# Altium PCB PCB1.PcbDoc
Units mm, origin at the board's own origin, x right, y up, seen from the top; angles counter-clockwise.
Board outline 41.91 x 29.34 mm, 2 copper layers (Top Layer, Bottom Layer); 12 components, 6 nets, 32 pads, 6 vias.
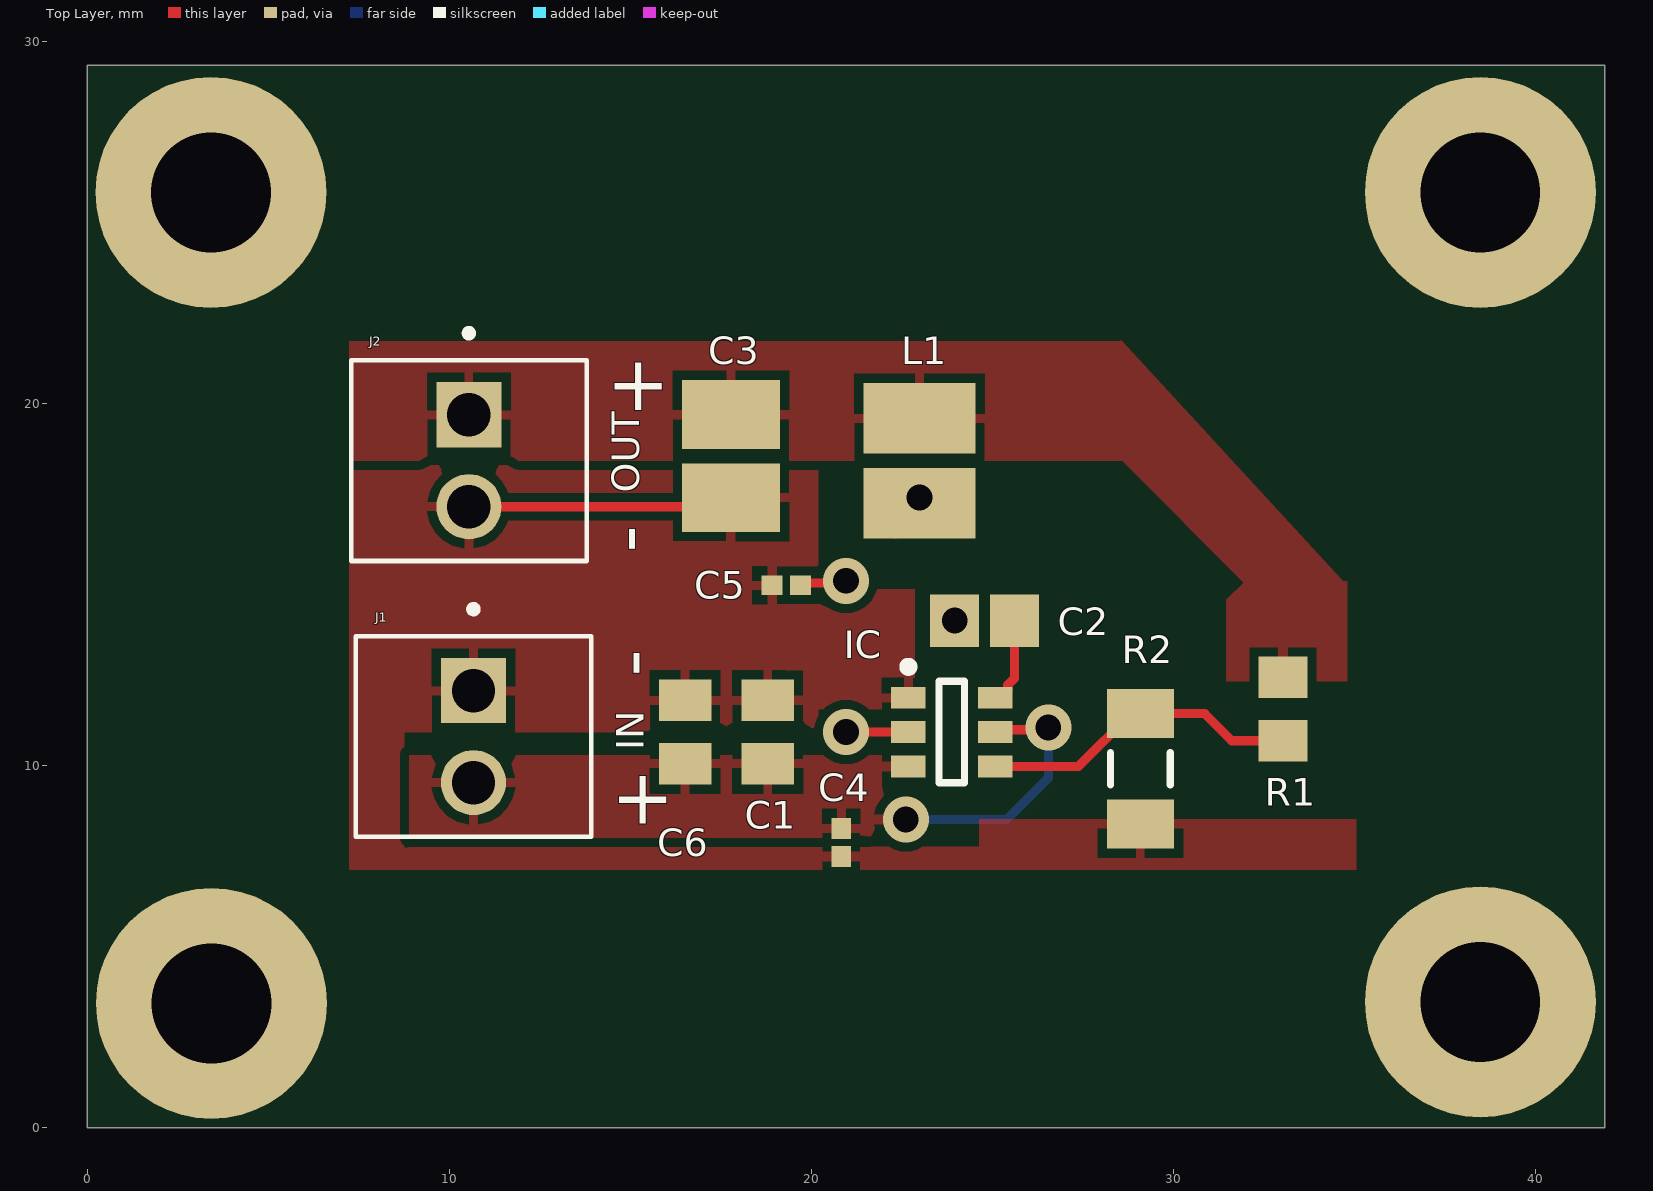
[diagram p0: Top Layer view]
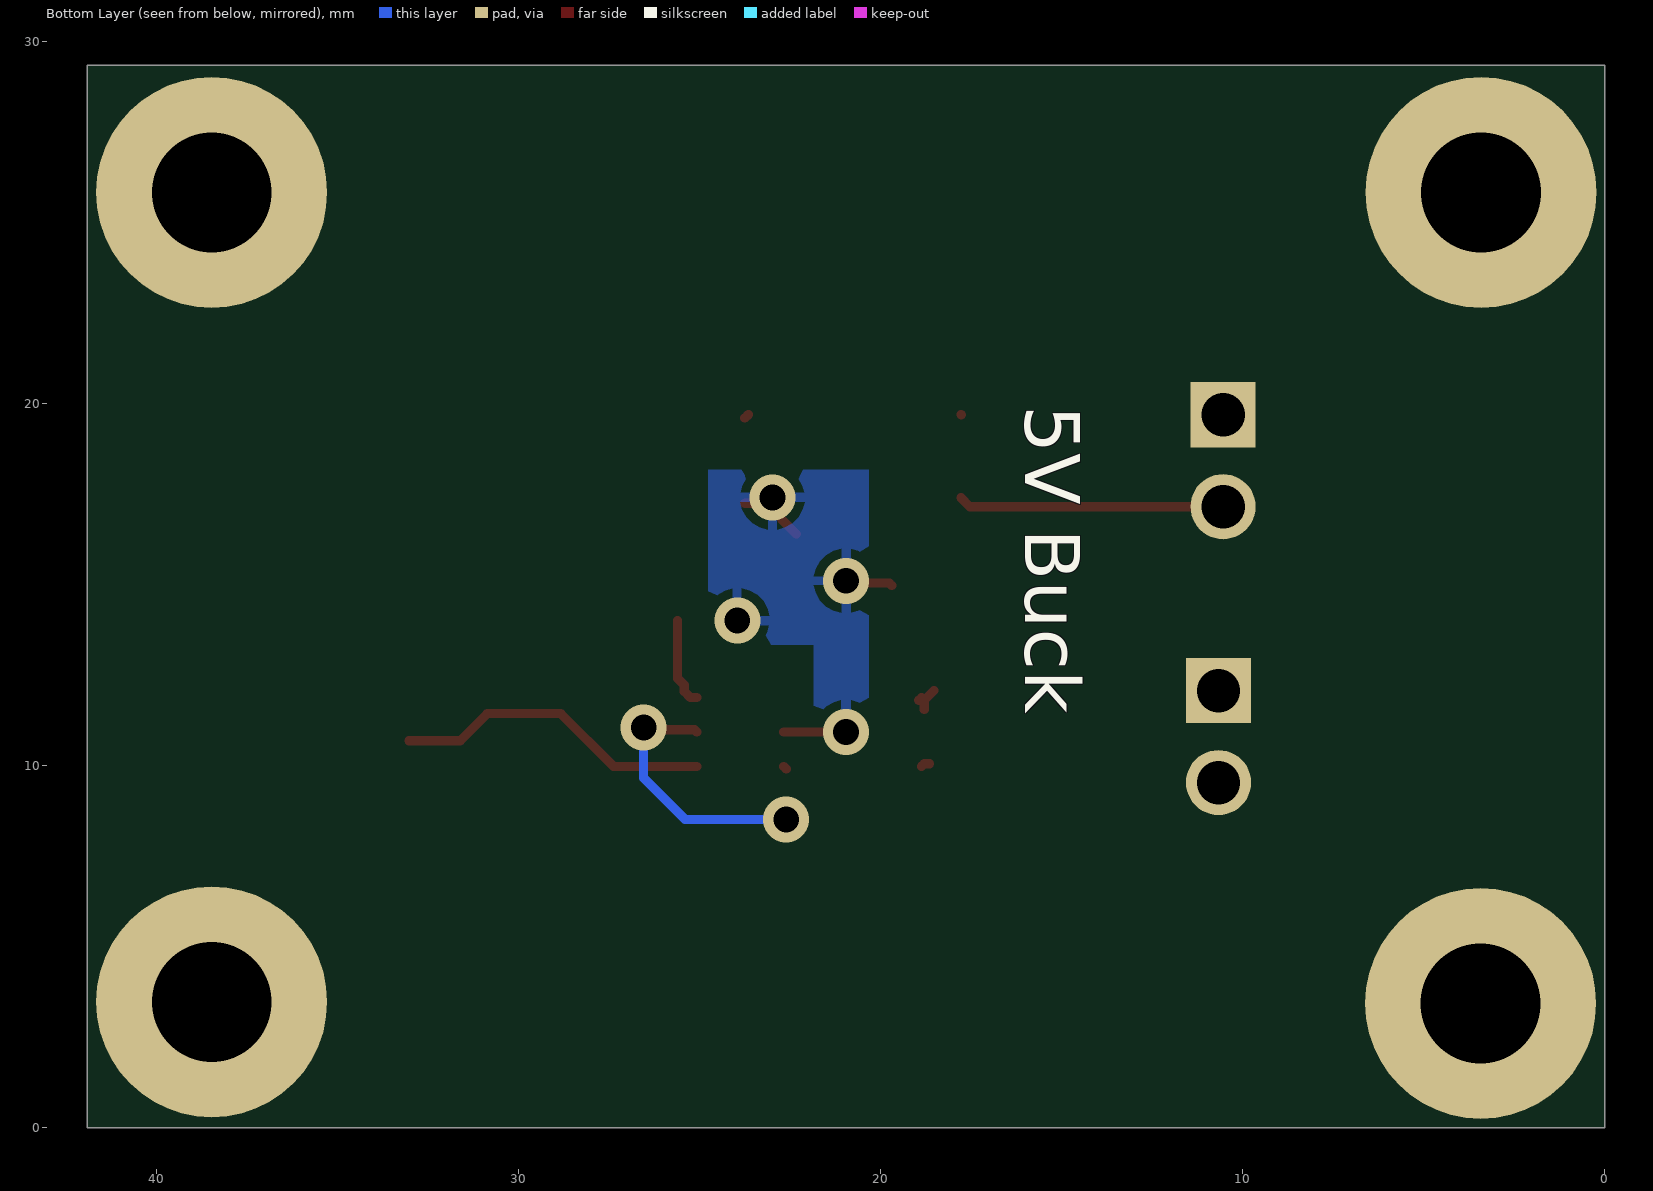
[diagram p1: Bottom Layer view, seen from below]

## Layer stack, top to bottom
Top Solder: solder mask 0.0102, Solder Resist, Dk 3.5
Top Layer: signal copper 0.0356
Dielectric 1: dielectric 0.32, FR-4, Dk 4.8
Bottom Layer: signal copper 0.0356
Bottom Solder: solder mask 0.0102, Solder Resist, Dk 3.5

## Board outline
41.91,29.337 0,29.337 0,0 41.91,0

## Design rules (kind name [scope] priority, off if disabled: settings)
AssemblyTestPointUsage [All] p1: isadvanced=TRUE
AssemblyTestpoint [All] p1: isadvanced=TRUE testpointundercomponent=TRUE minsize=1.016 maxsize=2.54 preferedsize=1.524 minholesize=0 maxholesize=1.016 preferedholesize=0.813 testpointgrid=0.025 usegrid=TRUE gridtolerance=0 allowsidetop=TRUE allowsidebottom=TRUE
Clearance Clearance_1 [OnMid vs OnMid] p1: gap=0.254 ignorepadtopadclearanceinfootprint=FALSE sourcerule=38 cellrowname=All cellrowtype=0 cellcolname=All cellcoltype=0 innerlayers=TRUE
Clearance Clearance_2 [(ExistsOnLayer('Top Layer') Or ExistsOnLayer('Bottom Layer')) vs (ExistsOnLayer('Top Layer') Or ExistsOnLayer('Bottom Layer'))] p2: gap=0.254 ignorepadtopadclearanceinfootprint=FALSE sourcerule=38 cellrowname=All cellrowtype=0 cellcolname=All cellcoltype=0 outerlayers=TRUE
Clearance [All] p3: gap=0.254 ignorepadtopadclearanceinfootprint=FALSE ismatrix=TRUE
ComponentClearance [All] p1: isadvanced=TRUE gap=0.254 collisioncheckmode=3 verticalgap=0.254 showdistances=FALSE
FabricationTestPointUsage [All] p1: isadvanced=TRUE valid=0 allowmultiple=FALSE
FabricationTestpoint [All] p1: isadvanced=TRUE side=3 testpointundercomponent=TRUE minsize=1.016 maxsize=2.54 preferedsize=1.524 minholesize=0 maxholesize=1.016 preferedholesize=0.813 testpointgrid=0.025 allowsidetop=TRUE allowsidebottom=TRUE usegrid=TRUE gridtolerance=0
FanoutControl Fanout_BGA [IsBGA] p1: isadvanced=TRUE bgadir=Out bgaviamode=Centered fanoutstyle=Auto fanoutdirection=Alternating viagrid=0.025 // Fanout_BGA (Default Rule)
FanoutControl Fanout_LCC [IsLCC] p2: isadvanced=TRUE bgadir=Out bgaviamode=Centered fanoutstyle=Auto fanoutdirection=Alternating viagrid=0.025 // Fanout_LCC (Default Rule)
FanoutControl Fanout_SOIC [IsSOIC] p3: isadvanced=TRUE bgadir=Out bgaviamode=Centered fanoutstyle=Auto fanoutdirection=Alternating viagrid=0.025 // Fanout_SOIC (Default Rule)
FanoutControl Fanout_Small [(CompPinCount < 5)] p4: isadvanced=TRUE bgadir=Out bgaviamode=Centered fanoutstyle=Auto fanoutdirection=OutThenIn viagrid=0.025 // Fanout_Small (Default Rule)
FanoutControl Fanout_Default [All] p5: isadvanced=TRUE bgadir=Out bgaviamode=Centered fanoutstyle=Auto fanoutdirection=Alternating viagrid=0.025 // Fanout_Default (Default Rule)
Height [All] p1: isadvanced=TRUE minheight=0 maxheight=25.4 prefheight=12.7
HoleSize [All] p1: isadvanced=TRUE absolutevalues=TRUE maxlimit=3.81 minlimit=0.025 maxpercent=80.000 minpercent=20.000
HoleToHoleClearance [All] p1: isadvanced=TRUE gap=0.254 allowstackedmicrovias=TRUE
LayerPairs [All] p1: isadvanced=TRUE enforce=TRUE
MinimumSolderMaskSliver [All] p1: isadvanced=TRUE minsoldermaskwidth=0.075
NetAntennae [All] p1: isadvanced=TRUE netantennaetolerance=0
PasteMaskExpansion [All] p1: isadvanced=TRUE expansion=0
PlaneClearance [All] p1: isadvanced=TRUE clearance=0.508
PlaneConnect [All] p1: isadvanced=TRUE planeconnectstyle=Relief reliefexpansion=0.508 reliefentries=4 reliefconductorwidth=0.254 reliefairgap=0.254
PolygonConnect [All] p1: connectstyle=Relief reliefconductorwidth=0.254 reliefentries=4 polygonreliefangle="90 Angle" airgapwidth=0.254
RoutingCorners [All] p1: isadvanced=TRUE cornerstyle=45-Degree minsetback=2.54 maxsetback=2.54
RoutingPriority [All] p1: isadvanced=TRUE routingpriority=0
RoutingVias RoutingViaStyle_1 [All] p1: isadvanced=TRUE holewidth=0.711 width=1.016 viastyle="Through Hole" minholewidth=0.711 minwidth=0.762 maxholewidth=0.711 maxwidth=1.27
RoutingVias [All] p2: holewidth=0.711 width=1.27 viastyle="Through Hole" minholewidth=0.711 minwidth=1.27 maxholewidth=0.711 maxwidth=1.27
ShortCircuit [All] p1: isadvanced=TRUE allowed=FALSE
SilkToSilkClearance [All] p1: isadvanced=TRUE silktosilkclearance=0.254
SilkToSolderMaskClearance [IsPad] p1: isadvanced=TRUE minsilkscreentomaskgap=0.254 clearancetoexposedcopper=TRUE
SolderMaskExpansion [All] p1: isadvanced=TRUE expansion=0.05 istentingtop=FALSE
SupplyNets "Schematic Supply Nets" [InNet('GND')] p1: isadvanced=TRUE voltage=0.000
UnRoutedNet [All] p1: isadvanced=TRUE
UnpouredPolygon [All] p1: isadvanced=TRUE
Width [All] p1: maxlimit=0.254 minlimit=0.254 preferedwidth=0.254
4 further rules are at their usual default settings.

## Components (designator, comment, footprint, x,y, rotation, side; value= is the part's Value field where it differs from the comment)
C1 "MSAST21GBB5106MTNA01" CAPC2012X14N 18.796,10.922 r90 top value=10µF
C2 "08053C104KAT2A" CAPC2012X06N 24.78,14.001 r180 top value=100nF
C3 "GRM32ER61C476KE15L" CAPC3225X27N 17.78,18.542 r270 top value=47µF
C4 "Capacitor 0.1 uF +/- 5% 16 V 0402" CAPC1005X56X25LL10T15 20.828,7.874 r270 top value=100nF
C5 "Capacitor 0.1 uF +/- 5% 16 V 0402" CAPC1005X56X25LL10T15 19.304,14.97 r180 top value=100nF
C6 "MSAST21GBB5106MTNA01" CAPC2012X14N 16.51,10.922 r90 top value=10µF
IC "TPS561208DDCR" SOT95P245X110-6N 23.876,10.922 r0 top
J1 "282834-2" TE_282834-2 10.668,10.795 r270 top
J2 "282834-2" TE_282834-2 10.541,18.415 r270 top
L1 "VLS3015ET-4R7M" INDP3030X15N 22.987,18.415 r90 top value=4.7µH
R1 "ERJ-6ENF5622V" RESC2012X07N 33.02,11.557 r270 top value=56.2k
R2 "Resistor 10k +/-1% 1206 250 mW" RESC3216X60X45ML15T20 29.083,9.906 r270 top value=10k

## Footprints (in the part's own frame and the unit in brackets; to place one, negate y for a bottom-side part, rotate by r counter-clockwise, add the part's x,y. Pads: shape width x height; smd on the part's side, far side on the other; paste and mask are expansions set on the pad)
CAPC1005X56X25LL10T15 [mm] "Chip Capacitor, 2-Leads, Body 1.10x0.60mm, IPC High Density"
  rect 0.58x0.54 smd: 1(-0.39,0) 2(0.39,0)
  body extent -0.55,-0.3 0.55,0.3, height 0.56
CAPC2012X06N [mm] "Chip Capacitor, 2-Leads, Body 2.01x1.25mm, IPC Medium Density"
  rect 1.35x1.45 smd: 1(-0.825,0) 2(0.825,0)
  body extent -1.1,-0.72 1.11,0.72, height 0.56
CAPC2012X14N [mm] "Chip Capacitor, 2-Leads, Body 2.00x1.25mm, IPC Medium Density"
  rect 1.15x1.45 smd: 1(-0.875,0) 2(0.875,0)
  body extent -1.1,-0.72 1.1,0.72, height 1.45
CAPC3225X27N [mm] "Chip Capacitor, 2-Leads, Body 3.20x2.50mm, IPC Medium Density"
  rect 1.9x2.7 smd: 1(-1.15,0) 2(1.15,0)
  body extent -1.75,-1.35 1.75,1.35, height 2.7
INDP3030X15N [mm] "Precision Wire Wound Inductor, 2-Leads, Body 3.00x3.00mm, IPC Medium Density"
  rect 1.95x3.1 smd: 1(-1.175,0) 2(1.175,0)
  body extent -1.55,-1.55 1.55,1.55, height 1.5
RESC2012X07N [mm] "Chip Resistor, 2-Leads, Body 2.00x1.25mm, IPC Medium Density"
  rect 1.15x1.35 smd: 1(-0.875,0) 2(0.875,0)
  body extent -1.1,-0.67 1.1,0.67, height 0.7
RESC3216X60X45ML15T20 [mm] "Chip Resistor, 2-Leads, Body 3.3x1.75mm, IPC Low Density"
  rect 1.35x1.85 smd: 1(-1.525,0) 2(1.525,0)
  silkscreen extent -0.45,-0.82 0.45,0.82, body extent -1.65,-0.87 1.65,0.87, height 0.6
SOT95P245X110-6N [mm] "SOT23, 6-Leads, Body 2.90x2.45mm, Pitch 0.95mm, IPC Medium Density"
  rect 0.95x0.6 smd: 1(-1.2,0.95) 2(-1.2,0) 3(-1.2,-0.95) 4(1.2,-0.95) 5(1.2,0) 6(1.2,0.95)
  silkscreen extent -1.32,-1.4 0.35,1.92, body extent -0.72,-1.37 0.72,1.38, height 1.1
TE_282834-2 [mm]
  rect 1.8x1.8 / inner round 1.8 / far side rect 1.8x1.8 hole 1.2: 1(-1.27,0)
  round 1.8 hole 1.2: 2(1.27,0)
  silkscreen extent -3.62,-3.25 2.77,3.25, body extent -2.77,-3.25 2.77,3.25, height 10

## Part data
C1 C6: library part CMP-001-00084-1, "Ceramic Capacitor, Multilayer, Ceramic, 25V, 20% +Tol, 20% -Tol, X5R, 15% TC, 10uF, Surface Mount, 0805", Max Operating Temperature=85°C, Min Operating Temperature=-55°C, Height=1.25mm, Length=2mm, Mounting Technology="Surface Mount", Width=1.25mm
C2: library part CMP-001-00085-1, "0805 100 nF 25V ±10 % Tolerance X7R Surface Mount Multilayer Ceramic Capacitor", Case/Package=0805, Dielectric=X7R, Dielectric Material=Ceramic, Max Operating Temperature=125°C, Min Operating Temperature=-55°C, Tolerance=10%, Voltage Rating=25V, Depth=1.25mm, Height=940µm, Mounting Technology="Surface Mount", Number of Terminals=2, Pins=2, Thickness=939.8µm, Voltage Rating (DC)=25V, Width=1.25mm
C3: library part CMP-001-00086-1, "Capacitor: ceramic; MLCC; 47uF; 16V; X5R; ±10%; SMD; 1210; Series: GRM", Case/Package=1210, Max Operating Temperature=85°C, Min Operating Temperature=-55°C, Tolerance=10%, Voltage=16V, Depth=2.5mm, Height=2.5mm, Length=3.2mm, Mounting Technology="Surface Mount", Pins=2, Voltage Rating=16V, Width=2.5mm
C4 C5: library part CMP-001-00001-6, "Chip Capacitor, 0.1 uF, +/- 5%, 16 V, 0402 (1005 Metric)", Capacitor Type=Ceramic, Case/Package=0402, Max Operating Temperature=125°C, Min Operating Temperature=-55°C, Tolerance=5%, Voltage Rating=16V, Mounting Technology=SM, Pins=2, RoHS Compliant=True
IC: library part CMP-019-00049-1, "4.5V to 17V Input, 1A Output, Synchronous Step-Down Converter 6-SOT-23-THIN -40 to 125", Case/Package=SOT-23-6, Manufacturer Lifecycle Status=ACTIVE, Max Junction Temperature (Tj)=125°C, Max Operating Temperature=85°C, Max Supply Voltage=17V, Min Operating Temperature=-40°C, Min Supply Voltage=4.5V, Nominal Supply Current=590µA, Output Current=1A, Output Voltage=1.05V, Switching Frequency=580kHz, Height=1.1mm, Length=2.9mm, Lifecycle Status=Production, Max Duty Cycle=75%, Pins=6, RoHS=Compliant, Schedule B="8542390000, 8542390000", Thickness=870µm, Topology=Buck, Width=1.6mm
J1 J2: library part CMP-002-00072-1, "Terminal Block Connector PCB 2.54 mm 30-16 AWG Green 10 A 150 V M1.6", Case/Package=None, Centerline_Pitch="2.54 mm[.1 in]", Check_prices=https://www.snapeda.com/parts/282834-2/TE+Connectivity+AMP+Connectors/view-part/?ref=eda, Component Type=Standard, Design Item ID=282834-2, EU_RoHS_Compliance="Compliant with Exemptions", MF="TE Connectivity", MP=282834-2, Number_of_Positions=2, Pins=2, SnapEDA_Link=https://www.snapeda.com/parts/282834-2/TE+Connectivity+AMP+Connectors/view-part/?ref=snap, Source=282834-2.SchLib
L1: library part CMP-006-00021-1, "Inductor Power Shielded Wirewound 4.7uH 20% 1MHz Ferrite 1.35A 136mOhm DCR 1212 Blister T/R", Case/Package=1212, Current Rating=1.35A, DC Resistance (DCR)=136mΩ, Max Operating Temperature=105°C, Min Operating Temperature=-40°C, Tolerance=20%, Core Material=Ferrite, Depth=3.1mm, Height=1.5mm, Height - Seated (Max)=1.4986mm, Length=3mm, Max Current Rating=1.35A, Max Length=3.1mm, Max Width=3.1mm, Military Standard=Not, Min Length=2.9mm, Mounting Technology="Surface Mount", Width=3mm
R1: library part CMP-009-00178-1, "Res Thick Film 0805 56.2K Ohm 1% 0.125W(1/8W) ±100ppm/°C Molded SMD Punched Carrier T/R", Case/Package=0805, Max Operating Temperature=155°C, Min Operating Temperature=-55°C, Tolerance=1%, Voltage Rating=150V, Depth=1.25mm, Features="Automotive AEC-Q200", Height=600µm, Lead Free="Lead Free", Length=2mm, Mounting Technology="Surface Mount", Voltage Rating (DC)=150V, Width=1.25mm
R2: library part CMP-009-00016-5, "Chip Resistor, 10 KOhm, +/- 1%, 0.25 W, -55 to 155 degC, 1206 (3216 Metric)", Case/Package=1206, Max Operating Temperature=155°C, Min Operating Temperature=-55°C, Power=250mW, Tolerance=1%, Voltage Rating=200V, Mounting Technology=SM, Pins=2, RoHS Compliant=True

## Free pads (board coordinates)
  round 6.38 hole 3.31 unplated: 4(3.419,25.822) 4(3.429,3.429) 4(38.471,3.47) 4(38.471,25.822)

## Via types
v1: diameter 1.27, hole 0.711, Top Layer to Bottom Layer, 5 vias
v2: diameter 1.27, hole 0.711, Top Layer to Bottom Layer, tented top, 1 vias

## Nets (pads, with @x,y where several pads share a name; then routed paths per layer and width w, separated by ;. In a path a pad name is that pad's centre, name@x,y a point inside that pad or via, vN(x,y) a via of type N, cw(c..) or ccw(c..) an arc to the next point about the centre after c; other vN are vias at no path point)
GND: C1.2 C3.2 C4.2 C5.2 C6.2 IC.1 J1.1 J2.2 R2.2 | length 8.4
  Top Layer w0.254: J1.1@10.541,12.192 J1.1 ; J2.2 17.533,17.145 C3.2 ; C1.2@18.528,12.065 C1.2 ; C1.2@18.796,11.543 C1.2 ; C1.2@18.871,11.872 C1.2 ; C1.2@18.946,11.797 C1.2
NetC1_1: C1.1 C4.1 C6.1 IC.3 IC.5 J1.2 | length 7.7
  Top Layer w0.254: C1.1@18.646,10.047 C1.1 C1.1@18.871,9.972 ; IC.3@22.606,9.902 IC.3 ; IC.5 25.14,10.986 26.479,10.986 v1(26.543,11.049)
  Bottom Layer w0.254: v2(22.606,8.509) 25.4,8.509 26.543,9.652 v1(26.543,11.049)
NetC2_1: C2.1 IC.6 | length 2.5
  Top Layer w0.254: IC.6 25.251,11.872 25.424,12.045 25.424,12.22 25.605,12.401 C2.1
NetC2_2: C2.2 C5.1 IC.2 L1.1 | length 4.9
  Top Layer w0.254: C5.1 19.757,15.034 v1@20.892,15.034 ; v1@20.832,14.974 v1@20.892,15.034 ; v1(20.955,10.922) IC.2 ; v1(20.955,15.097) v1@20.892,15.034 ; L1.1@22.326,16.392 23.174,17.24 L1.1@23.749,17.24
  other v1: 23.955,14.001 22.987,17.399
NetC3_1: C3.1 J2.1 L1.2 R1.1 | length 0.2
  Top Layer w0.254: C3.1@17.773,19.685 C3.1 ; L1.2@23.647,19.692 L1.2@23.749,19.59
NetIC_4: IC.4 R1.2 R2.1 | length 8.9
  Top Layer w0.254: IC.4 27.374,9.972 28.833,11.431 R2.1 R2.1 30.861,11.43 31.609,10.682 R1.2

## Polygon pours and split planes (outlines as drawn)
NetC3_1 on Top Layer "NETC3_1_L01_P001" (solid, pour order 1): 7.239,21.717 28.575,21.717 28.575,18.415 7.239,18.415
GND on Top Layer "GND_L01_P015" (solid, pour order 15): 20.193,18.288 7.239,18.288 7.239,10.922 20.193,10.922
NetC3_1 on Top Layer "NETC3_1_L01_P027" (solid, pour order 27): 28.321,21.993 28.321,18.669 32.258,14.732 35.005,14.732
NetC3_1 on Top Layer "NETC3_1_L01_P025" (solid, pour order 25): 34.036,15.113 31.987,15.098 31.462,14.569 31.462,12.319 34.798,12.319 34.798,15.091
GND on Top Layer "GND_L01_P023" (solid, pour order 23): 35.052,7.112 24.638,7.112 24.638,8.509 35.052,8.509
GND on Top Layer "GND_L01_P022" (solid, pour order 22): 26.67,7.112 8.631,7.112 8.631,7.747 26.67,7.747
GND on Top Layer "GND_L01_P017" (solid, pour order 17): 7.239,10.922 8.763,10.922 8.763,7.112 7.239,7.112
GND on Top Layer "GND_L01_P016" (solid, pour order 16): 22.86,11.557 22.86,14.859 19.304,14.859 19.304,11.557
NetC1_1 on Top Layer "NETC1_1_L01_P003" (solid, remove dead copper, pour order 3): 23.241,10.287 8.89,10.287 8.89,8.001 23.241,8.001
NetC2_2 on Bottom Layer "NETC2_2_L02_P007" (solid, pour order 7): 24.765,18.161 24.765,13.335 20.32,13.335 20.32,18.161
NetC2_2 on Bottom Layer "NETC2_2_L02_P010" (solid, pour order 10): 20.32,13.716 20.32,10.541 21.844,10.541 21.844,13.716

## Silkscreen, mask and mechanical layers (free items; w line width, h text height)
Top Overlay:
  text "+" at 14.351,19.812 h1.52
  text "OUT" at 15.24,17.526 h0.76 r90
  text "-" at 15.621,15.875 h1.52 r90
  text "-" at 15.748,12.446 h1.52 r90
  text "IN" at 15.367,10.414 h0.76 r90
  text "+" at 14.478,8.382 h1.52
Bottom Overlay:
  text "5V Buck" at 16.002,19.939 h1.52 r90